# Altium PCB PCB1.PcbDoc (part 2 of 2)
Units mm, origin at the board's own origin, x right, y up, seen from the top; angles counter-clockwise.
Board outline 100 x 100 mm, 2 copper layers (Top Layer, Bottom Layer); 110 components, 80 nets, 496 pads, 98 vias.
Unrouted connection lines stored in the file: 40.
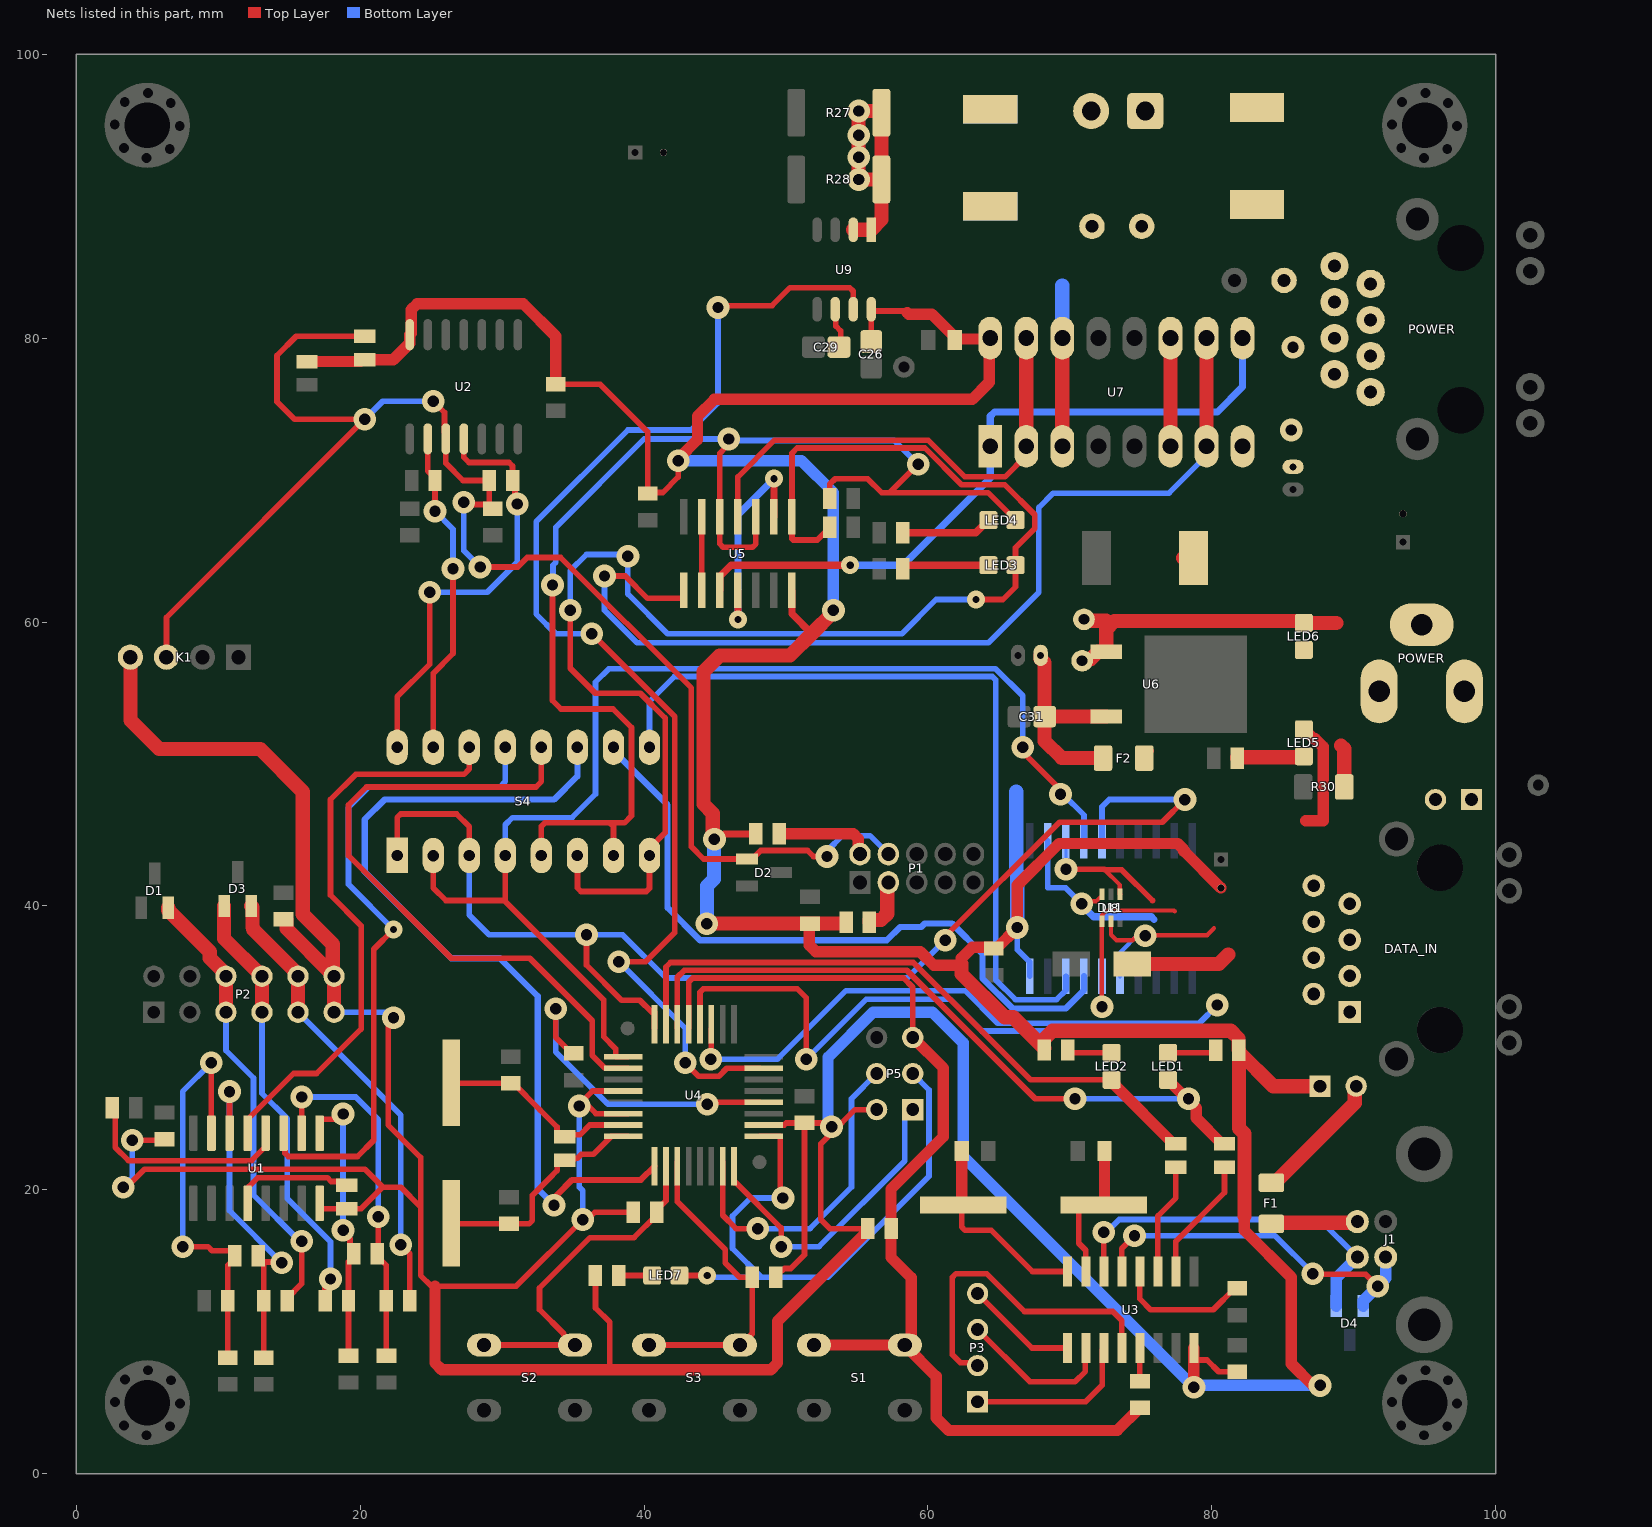
[diagram p2: the nets of this part, all layers, seen from the top]

## Via types
v1: diameter 1.6, hole 0.8, Top Layer to Bottom Layer, 90 vias
v2: diameter 1.27, hole 0.5, Top Layer to Bottom Layer, 6 vias
v3: diameter 1.27, hole 0.711, Top Layer to Bottom Layer, 2 vias

## Nets (pads, with @x,y where several pads share a name; then routed paths per layer and width w, separated by ;. In a path a pad name is that pad's centre, name@x,y a point inside that pad or via, vN(x,y) a via of type N, cw(c..) or ccw(c..) an arc to the next point about the centre after c; other vN are vias at no path point) (continued)
2A: C11.2 D2.1 K1.3 P1.4 R11.1 R20.1 U2.3 | length 107.4
  Top Layer w0.4: K1.3@6.35,57.531 6.35,60.325 20.066,74.041 20.066,74.295 15.367,74.295 14.136,75.526 14.136,78.779 15.493,80.136 R11.1@20.32,80.136 ; v1(25.146,75.565) 25.935,74.776 25.935,73.379 26.035,73.279 26.035,71.188 27.246,69.977 R20.1@29.083,69.977 29.083,68.25 29.046,68.287 27.471,68.287 v1(27.305,68.453) ; v1(28.448,63.881) 31.099,63.881 31.776,64.558 34.121,64.558 43.331,55.348 43.331,44.172 44.196,43.307 47.624,43.307 48.224,43.907 51.519,43.907 51.935,43.491 v1(52.889,43.491) ; P1.4@57.152,43.718 P1.4@57.214,43.656
  Bottom Layer w0.4: v1(20.32,74.295) 21.59,75.565 v1(25.146,75.565) ; v1(27.305,68.453) 27.305,65.024 v1(28.448,63.881) ; v1(52.889,43.491) 52.946,43.548 52.946,43.929 53.975,44.958 55.912,44.958 P1.4@57.214,43.656
3: D1.1 P2.5 P2.6 R5.1 | length 32.1
  Top Layer w0.4: R5.1@14.859,12.192 14.859,12.367 15.875,13.383 v1(15.875,16.383)
  Top Layer w1: D1.1@6.477,39.878 6.477,39.698 9.398,36.777 9.398,36.33 10.541,35.187 P2.6@10.541,35.052 P2.5@10.541,32.512
  Bottom Layer w0.4: P2.5@10.541,32.512 10.541,29.823 12.481,27.883 12.481,19.65 15.748,16.383 v1(15.875,16.383)
4: D3.2 P2.7 P2.8 R6.1 | length 31.1
  Top Layer w0.4: R6.1@17.527,12.192 17.527,13.336 v1(17.907,13.716)
  Top Layer w1: D3.2@10.414,40.005 10.414,37.719 P2.8@13.081,35.052 P2.7@13.081,32.512
  Bottom Layer w0.4: P2.7@13.081,32.512 13.081,26.797 14.859,25.019 14.859,19.394 17.907,16.346 v1(17.907,13.716)
5: D3.1 P2.9 P2.10 R7.2 | length 32.4
  Top Layer w0.4: v1(22.86,16.129) 23.495,15.494 R7.2@23.495,12.192
  Top Layer w1: D3.1@12.314,40.005 12.414,39.905 12.414,38.513 12.446,38.481 12.446,38.362 15.621,35.187 P2.10@15.621,35.052 P2.9@15.621,32.512
  Bottom Layer w0.4: P2.9@15.621,32.512 22.86,25.273 v1(22.86,16.129)
6: C1.1 C2.1 C8.1 C12.1 C13.1 C14.1 C21.1 C22.1 C24.POS C25.2 C26.2 DATA_IN.8 F2.2 K1.4 LED5.A P2.11 P2.12 P4.1 P5.2 R1.2 R2.1 R3.1 R10.2 R11.2 R13.1 R15.2 R17.1 R18.1 R21.1 R31.1 U1.16 U2.14 U3.16 U4.4 U4.6 U4.18 U5.14 U7.16 U8.20 U9.8 | length 536.5
  Top Layer w0.4: v1(3.302,20.193) 3.556,20.193 4.826,21.463 20.32,21.463 21.59,20.193 ; v1(3.937,23.495) 6.147,23.495 C12.1@6.223,23.571 ; U1.16@17.145,19.05 17.145,18.769 17.245,18.669 R13.1@19.05,18.669 20.066,18.669 21.59,20.193 ; v1(22.352,32.131) 21.971,31.75 21.971,24.575 24.257,22.289 24.257,18.796 ; C13.1@33.782,76.759 36.906,76.759 40.259,73.406 C22.1@40.259,69.063 40.333,69.136 41.323,69.136 42.4,70.213 42.4,71.356 v1(42.418,71.374) ; R31.1@36.577,13.97 36.577,11.683 37.592,10.668 37.592,7.332 ; U4.6@38.842,25.371 36.605,25.371 36.068,25.908 v1(35.433,25.908) 35.433,26.035 36.369,26.971 U4.4@38.842,26.971 ; R18.1@39.243,18.415 36.52,18.415 36.012,17.907 v1(35.687,17.907) 30.988,13.208 25.273,13.208 25.019,13.208 24.257,13.97 24.257,18.796 ; U4.18@48.142,24.571 49.866,24.571 50.01,24.714 C14.1@51.308,24.714 ; R21.1@49.275,13.843 49.275,14.018 49.55,14.293 49.725,14.293 49.891,14.459 50.34,14.459 51.308,15.427 C14.1@51.308,24.714 ; v1@53.435,24.225 52.451,23.241 52.451,17.907 53.086,17.272 R17.1@55.753,17.272 ; C26.2@56.007,79.767 U9.8@56.007,82.03 ; U9.8@56.007,82.042 U9.8@56.007,82.03 ; P5.2@56.388,25.654 54.864,25.654 53.911,24.701 53.899,24.714 C14.1@51.308,24.714 ; 58.547,81.788 58.42,81.915 56.122,81.915 U9.8@56.007,82.03 ; F2.2@75.237,50.419 F2.2@75.745,50.927 ; U3.16@78.74,8.13 78.858,8.012 79.662,8.012 80.485,7.188 C8.1@81.788,7.188 ; 87.851,46.007 87.851,46.054 ; 21.59,20.193 22.86,20.193 24.257,18.796
  Top Layer w0.5: v1@45.637,45.085 R1.2@47.879,45.085 ; U5.14@50.419,62.23 50.436,62.213 50.436,60.562 51.816,59.182
  Top Layer w0.8: R15.2@16.256,78.358 20.017,78.358 20.145,78.486 R11.2@20.32,78.486 22.33,78.486 23.495,79.651 U2.14@23.495,80.251 23.595,80.351 23.595,82.015 24.003,82.423 31.496,82.423 33.782,80.137 C13.1@33.782,76.759 ; 25.273,13.208 25.273,7.801 25.742,7.332 37.592,7.332 48.934,7.332 49.403,7.801 49.403,10.747 55.753,17.097 R17.1@55.753,17.272 ; v1(42.418,71.374) 42.418,71.509 43.765,72.856 43.765,74.499 44.958,75.692 63.119,75.692 64.325,76.898 64.325,79.947 61.963,79.947 61.963,80.01 60.275,81.698 58.637,81.698 58.547,81.788 ; C2.1@51.689,38.76 51.688,38.759 51.688,38.703 51.637,38.652 51.637,37.244 52.106,36.775 59.46,36.775 60.421,35.814 62.357,35.814 ; 62.357,35.91 62.357,36.322 63.119,37.084 64.465,37.084 64.592,36.957 C25.2@64.643,37.008 64.834,37.008 66.294,38.468 v1(66.294,38.481) 66.294,41.456 69.237,44.399 77.597,44.399 78.032,43.964 78.032,43.869 80.626,41.275 C24.POS@80.645,41.275 ; v1(78.74,6.096) 78.74,8.13 U3.16@78.74,8.862 ; 82.296,18.161 82.296,17.145 85.598,13.843 85.598,7.747 87.122,6.223 v1(87.63,6.223) ; LED5.A@86.487,52.451 87.157,51.781 87.278,51.781 87.851,51.208 87.851,46.054 ; 86.614,46.007 87.851,46.007
  Top Layer w1: K1.4@3.81,57.531 3.81,53.086 5.842,51.054 12.954,51.054 15.954,48.054 15.954,39.418 18.07,37.302 P2.12@18.07,35.143 ; C1.1@14.605,39.065 14.795,39.065 14.803,39.057 14.803,38.41 P2.12@18.07,35.143 ; P2.11@18.161,32.512 P2.12@18.161,35.052 P2.12@18.07,35.143 ; v1(44.426,38.759) C2.1@51.688,38.759 ; v1(44.958,44.704) 44.843,44.819 44.843,46.514 44.181,47.176 44.181,56.5 45.339,57.658 50.292,57.658 51.816,59.182 53.34,60.706 v1(53.34,60.833) ; C2.1@51.689,38.76 54.204,38.76 54.229,38.785 R10.2@54.229,38.862 ; 62.357,35.91 62.357,35.814 62.357,35.218 65.407,32.168 66.012,32.168 R3.1@68.199,29.98 ; 68.199,30.626 68.785,31.212 81.333,31.212 81.889,30.656 81.889,29.87 R2.1@81.914,29.845 R2.1@81.914,29.72 ; 82.296,18.161 82.296,23.959 81.914,24.341 R2.1@81.914,29.72 ; P4.1@87.63,27.305 84.329,27.305 R2.1@81.914,29.72
  Bottom Layer w0.4: v1(3.302,20.193) 3.937,20.828 v1(3.937,23.495) ; P2.11@18.161,32.512 v1@21.736,32.512 ; v1(35.433,25.908) 35.433,20.193 35.687,19.939 v1(35.687,17.907) ; v1(66.294,38.481) 66.294,36.924 67.183,36.035 U8.20@67.183,35.052
  Bottom Layer w0.8: v1(42.418,71.374) 51.093,71.374 53.34,69.127 v1(53.34,60.833) ; v1(53.213,24.447) 52.959,24.701 52.959,29.337 56.134,32.512 60.325,32.512 62.484,30.353 62.484,22.352 v1(78.74,6.096) 78.867,6.223 v1(87.63,6.223)
  Bottom Layer w1: v1(44.426,38.759) 44.426,41.403 44.927,41.904 44.927,44.673 v1(44.958,44.704) ; 66.216,48.055 66.216,42.387 66.294,42.309 v1(66.294,38.481)
A+: C5.1 R6.2 R9.2 U1.1 | length 20.2
  Top Layer w0.4: U1.1@17.145,24 17.145,24.875 17.245,24.975 18.371,24.975 18.602,25.206 18.659,25.206 v1(18.796,25.343) ; v1(18.796,17.154) 18.796,17.037 19.284,16.549 19.284,15.594 19.559,15.319 19.177,14.937 R6.2@19.177,12.192 C5.1@19.177,8.306
  Bottom Layer w0.4: v1(18.796,17.154) v1(18.796,25.343)
A-: C6.1 R7.1 R9.1 U1.2 | length 25.5
  Top Layer w0.4: U1.2@15.875,24 v1(15.875,26.543) ; v1(21.273,18.098) 21.273,15.382 21.209,15.319 21.845,14.683 R7.1@21.845,12.192 C6.1@21.844,8.306 C6.1@21.844,8.306
  Bottom Layer w0.4: v1(15.875,26.543) 19.685,26.543 21.273,24.956 v1(21.273,18.098)
B+: C3.1 R4.2 R8.2 U1.7 | length 30.1
  Top Layer w0.4: v1(7.493,16.002) 9.271,16.002 9.573,15.7 10.901,15.7 11.176,15.425 11.176,15.192 10.667,14.683 R4.2@10.667,12.192 C3.1@10.668,8.179 C3.1@10.668,8.179 ; v1(9.506,28.956) 9.516,28.947 9.516,24.009 U1.7@9.525,24
  Bottom Layer w0.4: v1(7.493,16.002) 7.493,26.924 9.506,28.937 v1(9.506,28.956)
B-: C4.1 R5.2 R8.1 U1.6 | length 25.3
  Top Layer w0.4: U1.6@10.795,24 v1(10.795,26.924) ; R8.1@12.826,15.367 12.826,15.192 R8.1@13.101,14.917 ; C4.1@13.208,8.179 C4.1@13.208,8.179 R5.2@13.209,12.192 13.209,14.809 R8.1@13.101,14.917 ; v1(14.478,14.859) 14.42,14.917 R8.1@13.101,14.917
  Bottom Layer w0.4: v1(10.795,26.924) 10.795,18.542 v1(14.478,14.859)
D: D11.3 DATA_IN.6 P6.2 U8.2 | length 13.5
  Top Layer w0.2: D11.3@72.173,40.64 72.248,40.715 D11.3@72.248,40.828
  Top Layer w0.3: v1(70.83,40.155) 71.016,40.341 71.874,40.341 D11.3@72.173,40.64
  Bottom Layer w0.4: U8.2@68.453,44.602 68.453,41.275 69.71,41.275 v1(70.83,40.155)
  Bottom Layer w0.5: v1(70.83,40.155) 70.83,40.086 71.673,39.243 75.74,39.243 75.924,39.059
Dir: LED4.A R23.1 S4.5 S4.7 U5.3 U5.5 | length 94.9
  Top Layer w0.4: S4.5@32.766,43.561 32.766,45.623 33,45.858 37.581,45.858 ; v1(33.547,62.616) 33.547,54.476 34.143,53.88 37.814,53.88 39.116,52.578 39.116,46.355 38.619,45.858 37.581,45.858 ; S4.7@37.846,43.561 37.846,45.593 37.581,45.858 ; v1(45.974,72.898) 45.744,72.668 45.744,72.306 45.339,71.901 45.339,65.512 45.573,65.278 47.645,65.278 47.879,65.512 U5.3@47.879,66.853 ; R23.1@53.087,68.707 53.087,69.724 53.467,70.104 55.753,70.104 56.736,69.121 57.31,69.121 ; v1(59.309,71.12) 57.31,69.121 ; LED4.A@66.167,67.183 64.229,69.121 57.31,69.121
  Bottom Layer w0.4: v1(33.547,62.616) 33.589,62.658 33.589,64.016 33.789,64.216 33.789,66.682 40.005,72.898 v1(45.974,72.898) 46.07,72.802 57.627,72.802 v1(59.309,71.12)
Dir2: U5.6 U5.9 | length 5.2
  Top Layer w0.4: U5.9@44.069,62.23 U5.6@44.069,67.412
Dir_D: S4.10 U8.17 | length 48.7
  Bottom Layer w0.444: S4.10@37.846,51.181 37.846,50.927 41.656,47.117 41.656,39.871 43.94,37.587 57.109,37.587 58.041,38.519 59.525,38.519 59.77,38.764 61.7,38.764 63.84,36.624 63.84,34.92 65.98,32.78 69.704,32.78 70.993,34.069 U8.17@70.993,35.052
Dir_M: S4.12 U4.2 | length 47.6
  Top Layer w0.4: S4.12@32.766,51.181 32.766,48.768 32.385,48.387 20.447,48.387 19.177,47.117 19.177,43.561 26.416,36.322 31.944,36.322 36.35,31.915 36.35,29.464 37.243,28.571 U4.2@38.842,28.571
En2: U5.2 U5.11 | length 15.7
  Top Layer w0.5: v2(46.609,60.198) U5.11@46.609,62.23 ; U5.2@49.149,67.412 v2(49.149,70.104)
  Bottom Layer w0.5: v2(46.609,60.198) 46.609,67.564 v2(49.149,70.104)
En_A: S4.13 U1.3 | length 47.8
  Top Layer w0.4: U1.3@14.605,24 14.705,23.9 14.705,22.584 14.939,22.35 19.81,22.35 20.955,23.495 20.955,36.957 v2(22.352,38.354)
  Bottom Layer w0.4: v2(22.352,38.354) 19.177,41.529 19.177,46.939 20.625,48.387 29.845,48.387 30.226,48.768 S4.13@30.226,51.181
En_A_2: R19.2 S4.15 U2.2 | length 23.6
  Top Layer w0.4: U2.2@24.765,73.279 24.765,70.659 25.272,70.152 R19.2@25.272,69.977 v1(25.272,67.819) ; S4.15@25.146,51.181 25.146,56.388 26.543,57.785 v1(26.543,63.754) v1@26.67,63.627
  Bottom Layer w0.4: v1(25.272,67.819) 26.543,66.548 v1(26.543,63.754)
En_A_COM: S4.2 S4.4 U4.1 U8.4 | length 86.7
  Top Layer w0.4: S4.2@25.146,43.551 25.146,41.275 26.035,40.386 30.226,40.386 ; S4.4@30.226,43.561 30.226,40.323 37.15,33.398 37.15,30.795 38.008,29.937 38.008,29.371 U4.1@38.842,29.371 ; v1(66.675,51.181) 66.675,50.86 69.342,48.193 v1(69.342,47.872)
  Bottom Layer w0.4: S4.4@30.226,43.561 30.226,45.72 30.734,46.228 34.925,46.228 36.576,47.879 36.576,55.773 37.523,56.72 64.764,56.72 66.675,54.808 v1(66.675,51.181) ; v1(69.342,47.872) 69.523,47.872 70.993,46.402 U8.4@70.993,44.602
En_A_out: D11.4 DATA_IN.5 U8.16 | length 13.9
  Top Layer w0.3: v1(72.263,32.893) 72.255,32.901 72.255,38.92 D11.4@72.248,38.928 72.273,38.953 72.273,39.373 72.578,39.678 77.334,39.678 77.388,39.624
  Bottom Layer w0.2: v1(72.263,32.893) U8.16@72.263,35.052
En_B: S4.14 U1.5 | length 40.9
  Top Layer w0.4: U1.5@12.065,24 12.065,24.95 15.309,28.194 16.926,28.194 20.066,31.334 20.066,38.608 17.907,40.767 17.907,47.498 19.685,49.276 27.305,49.276 27.686,49.657 S4.14@27.686,51.181
En_B_2: R20.2 S4.16 U2.4 | length 31.2
  Top Layer w0.4: S4.16@22.606,51.181 22.606,54.737 24.892,57.023 v1(24.892,62.103) ; U2.4@27.305,73.279 27.305,71.608 27.666,71.247 30.48,71.247 30.733,70.994 R20.2@30.733,69.977 30.904,69.806 30.904,68.493 v1(31.07,68.327)
  Bottom Layer w0.4: v1(24.892,62.103) 28.956,62.103 31.07,64.217 v1(31.07,68.327)
En_B_COM: S4.1 S4.3 U4.32 U8.5 | length 90
  Top Layer w0.4: S4.1@22.606,43.561 22.606,46.228 22.86,46.482 26.797,46.482 27.686,45.593 S4.3@27.686,43.561 ; v1(35.941,37.973) 35.941,35.834 38.411,33.364 39.699,33.364 40.542,32.521 40.742,32.521 U4.32@40.742,31.371 ; v1(61.214,37.592) 61.214,37.846 69.273,45.905 76.512,45.905 v1(78.105,47.498)
  Bottom Layer w0.4: S4.3@27.686,43.561 27.686,39.37 29.083,37.973 v1(35.941,37.973) 38.49,37.973 41.538,34.925 58.547,34.925 v1(61.214,37.592) ; U8.5@72.263,44.602 72.263,46.99 72.771,47.498 v1(78.105,47.498)
En_B_out: D11.5 DATA_IN.4 U8.15 | length 12.8
  Top Layer w0.3: D11.5@72.898,38.928 72.898,37.973 73.279,37.592 74.422,37.592 74.587,37.757 75.164,37.757 v1(75.311,37.904) ; v1@75.311,37.943 79.671,37.943 80.156,38.428
  Bottom Layer w0.3: U8.15@73.533,35.052 73.533,36.703 74.918,38.088 75.101,37.904 v1(75.311,37.904)
GND_M: D7.A D8.A R27.1 R28.1 U9.1 U9.2 | length 18.9
  Top Layer w1: U9.2@54.737,87.642 U9.1@56.007,87.642 56.721,88.356 R28.1@56.721,91.186 ; R27.1@56.721,96.901 R27.1@56.721,95.887 ; R28.1@56.721,91.186 v1(55.118,91.186) v1(55.118,96.012) 56.596,96.012 R27.1@56.721,95.887 ; R28.1@56.721,91.186 R27.1@56.721,95.885 R27.1@56.721,95.887
  other v1: 55.118,92.761 55.118,94.31
I_motor: U4.23 U9.7 | length 88.7
  Top Layer w0.4: v1(36.322,59.182) 42.164,53.34 42.164,38.123 40.109,36.068 v1(38.227,36.068) ; v1(42.894,28.958) 43.843,28.01 45.271,28.01 45.832,28.571 U4.23@48.142,28.571 ; v1(45.212,82.169) 45.339,82.296 49.022,82.296 50.292,83.566 54.483,83.566 54.737,83.312 U9.7@54.737,82.042
  Bottom Layer w0.4: v1(36.322,59.182) 33.782,59.182 32.397,60.567 32.397,67.068 38.862,73.533 43.307,73.533 45.212,75.438 v1(45.212,82.169) ; v1(38.227,36.068) 42.894,31.401 v1(42.894,28.958)
K1: R18.2 S2.2 S2.3 U4.10 | length 25.8
  Top Layer w0.4: S2.3@28.731,9.069 S2.2@35.131,9.069 ; S2.2@35.056,9.069 34.341,9.784 34.341,9.859 32.639,11.561 32.639,13.081 36.195,16.637 39.29,16.637 40.893,18.24 R18.2@40.893,18.415 40.893,18.59 41.542,19.239 U4.10@41.542,21.971
K2: R21.2 S3.2 S3.3 U4.11 | length 22.4
  Top Layer w0.4: S3.3@40.351,9.069 S3.2@46.752,9.069 46.827,9.069 47.625,9.867 R21.2@47.625,13.843 46.736,13.843 45.72,14.859 45.72,15.796 42.342,19.174 U4.11@42.342,21.971
M1: C23.2 D6.A D8.K J2.2 U7.3 U7.14 | length 12.6
  Top Layer w1: U7.14@69.401,80.078 U7.14@69.469,80.01 U7.3@69.469,72.39 ; J2.2@71.501,96.012 71.271,95.782 71.283,95.782 J2.2@71.764,95.301
  Bottom Layer w1: U7.14@69.469,80.01 69.469,83.725 ; J2.2@71.501,96.012 J2.2@71.638,95.875
M2: C23.1 D5.A D7.K J2.1 U7.6 U7.11 | length 7.9
  Top Layer w1: U7.6@77.089,72.39 U7.11@77.089,80.01 U7.11@77.157,80.078
  Bottom Layer w1: J2.1@75.184,95.885 J2.1@75.311,96.012
NetC7_1: C7.1 U3.4 | length 9.7
  Top Layer w0.4: U3.4@74.93,14.252 74.93,12.319 75.692,11.557 80.099,11.557 81.597,13.056 C7.1@81.788,13.056
NetC9_1: C9.1 U3.13 | length 2.4
  Top Layer w0.4: C9.1@74.93,6.528 U3.13@74.93,8.862 U3.13@74.955,8.837
NetC15_2: C15.2 U3.7 X1.1 | length 10.2
  Top Layer w0.4: U3.7@71.12,14.252 71.12,15.748 70.631,16.237 70.631,18.523 71.031,18.923 X1.1@72.39,18.923
  Top Layer w0.8: X1.1@72.39,18.923 72.441,18.974 C15.2@72.441,22.733
NetC16_2: C16.2 U3.8 X1.2 | length 14.1
  Top Layer w0.4: X1.2@62.382,19.025 62.382,17.379 62.617,17.145 64.471,17.145 67.364,14.252 U3.8@69.85,14.252
  Top Layer w0.8: X1.2@62.382,19.025 C16.2@62.382,22.733
NetC17_2: C17.2 U4.20 | length 22.7
  Top Layer w0.4: v1(33.782,32.766) 33.782,30.745 34.91,29.616 C17.2@35.052,29.616 ; v1(44.45,26.035) 44.586,26.171 U4.20@48.142,26.171
  Bottom Layer w0.4: v1(33.782,32.766) 33.782,29.718 37.465,26.035 v1(44.45,26.035)
NetC18_1: C18.1 R22.1 U4.7 X2.2 | length 14.5
  Top Layer w0.4: X2.2@26.416,27.559 26.467,27.508 C18.1@30.607,27.508 30.797,27.508 32.673,25.633 33.867,24.439 33.867,24.023 34.142,23.748 R22.1@34.417,23.748 ; R22.1@34.417,23.875 35.306,23.875 35.481,23.875 36.177,24.571 U4.7@38.842,24.571
NetC19_2: C19.2 R22.2 U4.8 X2.1 | length 16
  Top Layer w0.4: X2.1@26.416,17.653 26.467,17.602 C19.2@30.48,17.602 31.897,17.602 32.131,17.837 32.131,19.625 33.294,20.787 33.874,21.368 33.874,21.823 34.149,22.098 R22.2@34.417,22.098 ; R22.2@34.848,21.942 35.131,22.225 35.306,22.225 35.581,22.5 36.421,22.5 37.692,23.771 U4.8@38.842,23.771
NetC29_1: C29.1 U9.6 | length 2.9
  Top Layer w0.4: U9.6@53.467,82.042 53.515,81.994 53.515,80.851 53.848,80.518 53.848,79.491 C29.1@53.732,79.375
NetC31_1: C31.1 C32.1 F2.1 U6.3 | length 15.1
  Top Layer w1: C32.1@67.945,57.658 67.945,57.408 68.221,57.132 C31.1@68.221,53.346 ; F2.1@72.337,50.419 69.435,50.419 68.221,51.633 C31.1@68.221,53.34 C31.1@68.221,53.346 ; U6.3@72.567,53.346 C31.1@68.221,53.346
NetD4_1: D4.1 J1.2 U3.6 | length 26.2
  Top Layer w0.4: U3.6@72.39,14.252 v1(72.39,17.018)
  Bottom Layer w0.4: v1(72.39,17.018) 72.578,17.018 73.474,17.914 87.598,17.914 J1.2@90.252,15.26
  Bottom Layer w0.8: D4.1@88.773,11.811 88.773,13.781 J1.2@90.252,15.26
NetD4_2: D4.2 J1.3 U3.5 | length 25.9
  Top Layer w0.4: U3.5@73.66,14.252 73.66,15.875 v1(74.549,16.764) ; v1(87.122,14.097) 87.172,14.047 90.851,14.047 v1(91.69,13.208)
  Bottom Layer w0.4: v1(74.549,16.764) 84.455,16.764 v1(87.122,14.097) ; J1.3@92.252,15.26 J1.3@92.252,15.537
  Bottom Layer w0.8: D4.2@90.673,11.811 90.673,12.191 92.252,13.77 J1.3@92.252,15.26
NetD9_K: D9.K POWER.1@91.186,76.205 POWER.2 POWER.3 POWER.4 | length 0.6
  Top Layer w1: D9.K@77.978,64.516 78.24,64.516 D9.K@78.494,64.262
NetD10_2: D10.C DATA_IN.1 | length 7
  Top Layer w1: D10.C@74.398,35.918 80.495,35.918 81.153,36.576
NetF1_1: F1.1 P4.2 | length 9.4
  Top Layer w1: F1.1@84.201,20.5 84.451,20.5 90.074,26.123 90.074,27.209 P4.2@90.17,27.305
NetF1_2: F1.2 J1.1 | length 6.1
  Top Layer w0.4: J1.1@90.172,17.68 J1.1@90.252,17.76
  Top Layer w1: F1.2@84.201,17.6 84.281,17.68 J1.1@90.172,17.68
NetLED1_A: LED1.A R2.2 | length 3.4
  Top Layer w0.4: LED1.A@76.915,29.654 80.073,29.654 R2.2@80.264,29.845
NetLED2_A: LED2.A R3.2 | length 3.2
  Top Layer w0.4: R3.2@69.849,29.855 70.05,29.654 LED2.A@72.936,29.654
NetLED3_K: LED3.K R25.1 | length 6.3
  Top Layer w0.4: R25.1@58.229,63.754 R25.1@58.356,63.627
  Top Layer w0.5: R25.1@58.229,63.754 58.229,63.783 58.454,64.008 LED3.K@64.262,64.008
NetLED4_K: LED4.K R26.1 | length 6.4
  Top Layer w0.5: R26.1@58.229,66.294 63.373,66.294 LED4.K@64.262,67.183
NetLED5_K: LED5.K R29.2 | length 4.8
  Top Layer w1: R29.2@81.788,50.419 81.788,50.457 81.813,50.482 86.423,50.482 LED5.K@86.487,50.546
NetLED6_K: LED6.K R30.1 | length 3
  Top Layer w1: 89.101,51.308 89.334,51.075 R30.1@89.334,48.387
NetLED7_A: LED7.A R31.2 | length 2.3
  Top Layer w0.4: R31.2@38.354,13.843 38.481,13.97 LED7.A@40.576,13.97
NetLED7_K: LED7.K P5.3 U4.17 | length 43.4
  Top Layer w0.4: LED7.K@42.481,13.97 v2(44.45,13.97) ; U4.17@48.142,23.771 49.592,23.771 49.592,19.623 v1(49.784,19.431)
  Bottom Layer w0.4: v2(44.45,13.97) 44.577,13.843 48.26,13.843 ; v1(49.784,19.431) 47.498,19.431 46.228,18.161 46.228,15.875 48.26,13.843 ; P5.3@58.928,28.194 60.078,27.044 60.078,20.962 52.959,13.843 48.26,13.843
NetP1_2: P1.2 R1.1 | length 6.8
  Top Layer w0.8: R1.1@49.529,45.085 54.745,45.085 55.08,44.75 55.08,43.79 P1.2@55.214,43.656
NetP1_3: P1.3 R10.1 | length 3.8
  Top Layer w1: R10.1@55.879,38.862 55.879,38.987 55.904,39.012 56.702,39.012 57.137,39.448 57.137,41.579 P1.3@57.214,41.656
NetP3_1: P3.1 U3.11 | length 11.9
  Top Layer w0.4: P3.1@63.5,5.08 71.12,5.08 72.272,6.232 72.272,8.745 U3.11@72.39,8.862
NetP3_2: P3.2 U3.12 | length 22.9
  Top Layer w0.4: P3.2@63.5,7.62 63.29,7.83 62.274,7.83 61.722,8.382 61.722,13.843 61.976,14.097 64.135,14.097 66.802,11.43 73.025,11.43 73.66,10.795 U3.12@73.66,8.862
NetP3_3: P3.3 U3.10 | length 11.1
  Top Layer w0.4: P3.3@63.5,10.16 67.183,6.477 70.358,6.477 71.093,7.212 71.093,8.835 U3.10@71.12,8.862
NetP3_4: P3.4 U3.9 | length 7.9
  Top Layer w0.4: P3.4@63.5,12.7 67.338,8.862 U3.9@69.85,8.862
NetP5_1: P5.1 U4.16 | length 22.1
  Top Layer w0.4: U4.16@46.342,21.648 46.342,20.521 46.461,20.521 49.657,17.325 v1(49.657,16.002)
  Bottom Layer w0.4: v1(49.657,16.002) 52.324,16.002 58.378,22.056 58.378,25.104 P5.1@58.928,25.654
NetP5_4: P5.4 U4.15 | length 23.2
  Top Layer w0.4: U4.15@45.542,21.971 45.542,18.212 46.482,17.272 v1(48.006,17.272)
  Bottom Layer w0.4: v1(48.006,17.272) 51.689,17.272 54.61,20.193 54.61,26.416 P5.4@56.388,28.194
NetR12_2: R12.2 U1.4 | length 15.2
  Top Layer w0.4: R12.2@2.54,25.781 2.737,25.584 2.737,22.998 3.672,22.063 12.348,22.063 13.335,23.05 U1.4@13.335,24
NetR13_2: R13.2 U1.12 | length 8.6
  Top Layer w0.4: U1.12@12.065,19.05 12.165,19.15 12.165,20.235 12.793,20.863 17.687,20.863 17.956,20.594 18.775,20.594 R13.2@19.05,20.319
NetR14_2: R14.2 U3.3 | length 7.9
  Top Layer w0.4: U3.3@76.2,14.252 76.2,18.161 77.47,19.431 R14.2@77.47,21.591
NetR16_2: R16.2 U3.2 | length 8.8
  Top Layer w0.4: U3.2@77.47,14.252 77.47,16.383 80.899,19.812 R16.2@80.899,21.591
NetU5_4: U5.4 U7.2 U7.15 | length 34.7
  Top Layer w0.4: U5.4@46.609,66.853 46.609,70.231 49.198,72.82 60.013,72.82 62.602,70.231 65.432,70.231 66.929,71.728 U7.2@66.929,72.39
  Top Layer w1: U7.2@66.929,72.39 U7.15@66.929,80.01
NetU5_8: U5.8 U7.7 U7.10 | length 69.3
  Top Layer w0.4: v1(37.211,63.246) 38.679,63.246 40.254,61.671 U5.8@42.799,61.671
  Top Layer w1: U7.7@79.629,72.39 U7.10@79.629,80.01
  Bottom Layer w0.4: v1(37.211,63.246) 37.211,60.833 39.497,58.547 64.262,58.547 67.818,62.103 67.818,68.072 68.834,69.088 76.989,69.088 79.629,71.728 U7.7@79.629,72.39
NetU5_10: U5.10 U7.1 U7.9 | length 49.3
  Top Layer w0.5: U5.10@45.339,62.23 45.339,63.213 46.134,64.008 v2(54.525,64.008)
  Bottom Layer w0.5: v2(54.525,64.008) 58.241,64.008 63.903,69.671 64.389,70.156 U7.1@64.389,72.39 64.389,74.51 64.682,74.803 80.391,74.803 82.169,76.581 U7.9@82.169,80.01
P: D11.1 DATA_IN.7 P6.1 U8.3 | length 11.2
  Top Layer w0.3: 72.417,42.591 72.463,42.545 73.523,41.485 73.523,40.853 D11.1@73.548,40.828
  Top Layer w0.4: v1(69.723,42.591) 72.417,42.591 ; 72.463,42.545 73.66,42.545 75.819,40.386
  Bottom Layer w0.2: v1(69.723,42.591) U8.3@69.723,44.602
Pwm: LED3.A R24.1 S4.6 S4.8 U5.1 | length 106.1
  Top Layer w0.4: v1(34.798,60.833) 34.798,56.749 36.556,54.991 39.735,54.991 41.486,53.24 41.486,45.161 40.386,44.061 S4.8@40.386,43.561 40.386,41.255 40.152,41.021 35.56,41.021 35.306,41.275 S4.6@35.306,43.561 ; R24.1@53.086,66.675 52.197,65.786 50.502,65.786 50.419,65.869 U5.1@50.419,67.412 50.419,71.902 50.787,72.27 59.785,72.27 62.385,69.671 65.422,69.671 67.525,67.567 67.525,66.601 66.167,65.243 LED3.A@66.167,64.008 66.167,62.484 65.278,61.595 v2(63.373,61.595)
  Bottom Layer w0.4: v1(34.798,60.833) 34.798,63.627 35.941,64.77 38.735,64.77 v1(38.862,64.643) 38.862,61.976 41.656,59.182 58.166,59.182 60.579,61.595 v2(63.373,61.595)
Pwm_D: S4.9 U8.18 | length 56.4
  Bottom Layer w0.4: S4.9@40.386,51.181 40.386,54.412 40.64,54.666 42.144,56.17 64.536,56.17 64.77,55.936 64.77,34.799 66.167,33.402 69.056,33.402 69.723,34.069 U8.18@69.723,35.052
Pwm_M: S4.11 U4.9 | length 61.5
  Top Layer w0.444: v1(33.655,18.923) 33.876,19.144 33.876,19.652 34.925,20.701 39.772,20.701 U4.9@40.742,21.671
  Bottom Layer w0.444: v1(33.655,18.923) 32.512,20.066 32.512,33.655 29.845,36.322 26.416,36.322 20.32,42.418 20.32,46.101 21.717,47.498 33.655,47.498 35.306,49.149 S4.11@35.306,51.181
RST: C9.2 P5.5 R17.2 S1.2 S1.3 U4.29 | length 75.7
  Top Layer w0.4: U4.29@43.142,31.371 43.142,34.633 43.434,34.925 58.277,34.925 58.928,34.274 P5.5@58.928,30.734
  Top Layer w0.8: S1.3@51.972,9.069 S1.2@58.372,9.069 ; P5.5@58.928,30.734 61.087,28.575 61.087,23.749 57.403,20.065 R17.2@57.403,17.272 57.403,15.241 58.815,13.829 58.815,9.512 S1.2@58.372,9.069 ; C9.2@74.93,4.648 73.33,3.048 61.595,3.048 61.468,3.048 60.833,3.683 60.579,3.937 60.579,5.842 60.579,6.862 S1.2@58.372,9.069
RX: LED2.K R14.1 U4.31 | length 45.8
  Top Layer w0.4: U4.31@41.542,31.371 41.542,35.7 41.867,36.025 58.971,36.025 67.246,27.749 LED2.K@72.936,27.749
  Top Layer w0.8: LED2.K@72.936,27.749 73.171,27.515 73.171,27.365 77.295,23.241 R14.1@77.47,23.241
SCL: DATA_IN.3 U4.28 | length 46.6
  Top Layer w0.4: U4.28@43.942,31.371 43.942,33.929 44.176,34.163 50.8,34.163 51.435,33.528 v1(51.435,29.21)
  Bottom Layer w0.4: v1(51.435,29.21) 55.661,33.436 61.56,33.436 63.803,31.193 80.596,31.193
SDA: DATA_IN.2 U4.27 | length 41.3
  Top Layer w0.4: v1(44.704,29.21) 44.742,29.248 U4.27@44.742,31.371
  Bottom Layer w0.4: v1(44.704,29.21) 49.403,29.21 54.229,34.036 62.611,34.036 64.904,31.743 79.114,31.743 v1(80.391,33.02)
TX: LED1.K R16.1 U4.30 | length 49.8
  Top Layer w0.4: U4.30@42.342,31.371 42.342,34.976 42.841,35.475 58.505,35.475 67.564,26.416 v1(70.358,26.416)
  Top Layer w0.8: LED1.K@76.915,27.749 78.899,25.765 78.899,25.066 80.724,23.241 R16.1@80.899,23.241
  Bottom Layer w0.4: v1(70.358,26.416) v1(78.359,26.416)
Vm: C20.POS C27.2 C28.POS C30.1 D5.K D6.K LED6.A pad.15 pad.16 POWER.1@91.79,55.118 POWER.5 POWER.6 POWER.7 POWER.8 U6.1 U7.8 | length 21.8
  Top Layer w1: pad.16@70.866,57.277 70.966,57.377 71.438,57.377 71.967,57.906 U6.1@72.567,57.906 72.567,59.485 73.153,60.071 86.36,60.071 LED6.A@86.487,59.944 88.773,59.944 ; pad.15@70.993,60.198 71.093,60.098 72.54,60.098 72.567,60.071 ; U7.8@82.169,72.39 U7.8@82.296,72.263
  other v1: 85.598,73.533 85.725,79.375
pads on no net: C26.0 C29.0 C31.0 D11.6 DATA_IN.9 DATA_IN.10 DATA_IN.11 DATA_IN.12 DATA_IN.13 DATA_IN.14 DATA_IN.C DATA_IN.D F1.0 F2.0 LED1.0 LED2.0 LED3.0 LED4.0 LED5.0 LED6.0 LED7.0 P1.7 P1.8 P1.9 P1.10 POWER.0 POWER.9 POWER.10 POWER.11 POWER.12 POWER.13 R27.0 R28.0 R30.0 U1.9 U1.10 U1.11 U1.13 U1.14 U1.15 U2.0 U2.5 U2.6 U2.8 U2.9 U2.10 U2.11 U2.12 U2.13 U3.14 U3.15 U4.12 U4.13 U4.14 U4.19 U4.22 U4.24 U4.25 U4.26 U4.F1 U4.F2 U5.12 U5.13 U8.6 U8.7 U8.8 U8.9 U8.11 U8.12 U8.13 U8.14

## Keep-outs
Keep-Out Layer:
  lines w0.254: 44.958,47.498 44.958,55.498 63.958,55.498 63.958,47.498 44.958,47.498

## Other copper
Top Layer:
  rectangle net Vm: 84.201,71.12 86.487,84.963
  rectangle net Vm: 81.026,70.612 86.487,74.168
  rectangle net 1: 80.264,82.042 83.693,85.217
  rectangle net 1: 70.739,82.042 83.693,83.185
  rectangle net M2: 73.787,86.614 76.581,98.044
  rectangle net M1: 70.104,86.614 73.025,98.044
  rectangle net GND_M: 76.962,85.471 85.598,90.805
  rectangle net GND_M: 61.341,83.82 80.01,86.36
  rectangle net GND_M: 61.341,83.82 67.056,91.44
  rectangle net GND_M: 59.563,87.757 67.056,91.567
  rectangle net GND_M: 56.896,87.757 59.69,97.917
  rectangle net M2: 73.787,93.345 85.344,98.044
  rectangle net M1: 61.849,93.345 73.025,98.044
  rectangle net 1: 73.406,67.691 86.741,70.104
  rectangle net 1: 70.739,62.484 73.787,74.168
  rectangle net 1: 70.739,69.723 75.819,82.804
Bottom Layer:
  rectangle net M2: 73.66,85.471 78.105,89.027
  rectangle net M1: 68.453,85.471 72.898,89.027
  rectangle net M2: 76.073,78.486 78.105,88.646
  rectangle net M1: 68.453,78.613 70.485,88.773
  rectangle net Vm: 61.722,89.408 85.725,92.964
  rectangle net M2: 73.787,93.345 85.344,98.044
  rectangle net M1: 61.849,93.345 73.025,98.044
  rectangle net 1: 75.184,52.197 82.423,56.007
  rectangle net Vm: 81.534,85.598 85.09,88.9
  rectangle net Vm: 84.328,70.612 86.487,88.011
  rectangle net Vm: 81.026,70.612 86.487,74.168
  rectangle net Vm: 69.85,56.261 83.058,61.214
  rectangle net Vm: 82.677,55.372 90.043,60.579
  rectangle net GND_M: 54.102,86.487 58.039,97.917
  rectangle net 1: 61.976,75.692 71.374,78.105
  rectangle net 1: 70.739,75.692 75.819,83.185
  rectangle net 1: 53.594,73.152 62.738,79.502
  rectangle net 1: 49.276,73.152 53.848,97.917

## Silkscreen, mask and mechanical layers (free items; w line width, h text height)
Top Overlay:
  circle w0.4: c95,95 r3.506
  circle w0.4: c95,5 r3.506
  circle w0.4: c5.005,5 r3.506
  circle w0.4: c5,95 r3.506
  lines w0.254: 0.762,60.071 51.308,60.071 ; 10.16,84.201 33.02,84.201 ; 10.287,92.202 32.893,92.202 ; 10.287,96.266 32.893,96.266 ; 60.452,89.408 60.452,97.917 ; 60.579,60.071 60.579,76.2 ; 60.579,81.153 60.579,82.804
  text "ACRRL" at 10.333,96.947 h1.2
  text "Dr.Asemani" at 10.46,94.788 h1.2
  text "Shiraz University" at 10.46,93.156 h1.2
  text "Designer:" at 10.333,90.743 h1.2
  text "Mohammad Sabouri" at 10.333,88.692 h1.2
  text "09360226014" at 10.333,86.914 h1.2
  text "Mohamadsabory@yahoo.com" at 10.333,85.155 h1.2
  text "A" at 8.682,54.021 h1.2
  text "B" at 6.015,53.894 h1.2
  text "Gnd" at 12.146,52.624 h1.2 r90
  text "+5V" at 4.018,52.37 h1.2 r90
  text "B" at 56.942,45.639 h1.2
  text "Gnd" at 59.517,45.258 h1.2 r90
  text "A" at 58.847,38.654 h1.2
  text "+5V" at 57.739,37.638 h1.2 r90
  text "Gnd" at 3.256,32.431 h1.2 r90
  text "B+" at 8.59,27.986 h1.2 r90
  text "B-" at 11.13,27.986 h1.2 r90
  text "A+" at 13.67,27.986 h1.2 r90
  text "A-" at 16.21,27.986 h1.2 r90
  text "DC Motor Driver & Controller" at 27.732,1.316 h1.2
Bottom Overlay:
  lines w0.254: 10.16,84.201 33.02,84.201 ; 10.287,92.202 32.893,92.202 ; 10.287,96.266 32.893,96.266
  text "ACRRL" at 32.847,96.947 h1.2
  text "Dr.Asemani" at 32.72,94.788 h1.2
  text "Shiraz University" at 32.72,93.156 h1.2
  text "Designer:" at 32.847,90.743 h1.2
  text "Mohammad Sabouri" at 32.847,88.692 h1.2
  text "POWER" at 94.823,87.33 h1.2 r90
  text "09360226014" at 32.847,86.914 h1.2
  text "Mohamadsabory@yahoo.com" at 32.847,85.155 h1.2
  text "POWER" at 112.73,58.085 h1.2
  text "DATA_IN" at 116.032,40.324 h1.2
  text "USB" at 90.124,22.144 h1.2
  text "DC Motor Driver & Controller" at 53.929,1.316 h1.2
Mechanical 1:
  the board outline again, w0.254

## Text inside footprints (layer, text, board x,y; h text height)
D1: Mechanical 15 "Q3" at 5.127,41.328 h0.5 r180
D2: Mechanical 15 "Q3" at 48.694,41.957 h0.5 r90
D3: Mechanical 15 "Q3" at 10.964,41.455 h0.5 r180
D4: Mechanical 15 "Q3" at 89.307,10.195 h0.5
DATA_IN: Top Overlay "1" at 92.215,32.533 h1.2 r90; Top Overlay "7" at 92.215,40.033 h1.2 r90
P2: Top Overlay "+5v" at 20.066,35.56 h1.2 r270
P5: Top Overlay "6" at 56.896,32.258 h1.2 r90; Top Overlay "5" at 59.436,32.258 h1.2 r90; Top Overlay "2" at 56.896,23.114 h1.2 r90; Top Overlay "1" at 59.436,23.622 h1.2 r90
S4: Top Overlay "ON" at 30.836,49.211 h1.2; Top Overlay "1" at 22.505,44.856 h1.2; Top Overlay "2" at 24.769,44.856 h1.2; Top Overlay "3" at 27.329,44.856 h1.2; Top Overlay "4" at 29.89,44.856 h1.2; Top Overlay "5" at 32.45,44.856 h1.2; Top Overlay "6" at 35.011,44.856 h1.2; Top Overlay "7" at 37.571,44.856 h1.2; Top Overlay "8" at 40.132,44.856 h1.2